# EAGLE board PCB v6 (EAGLE 9.7.0)
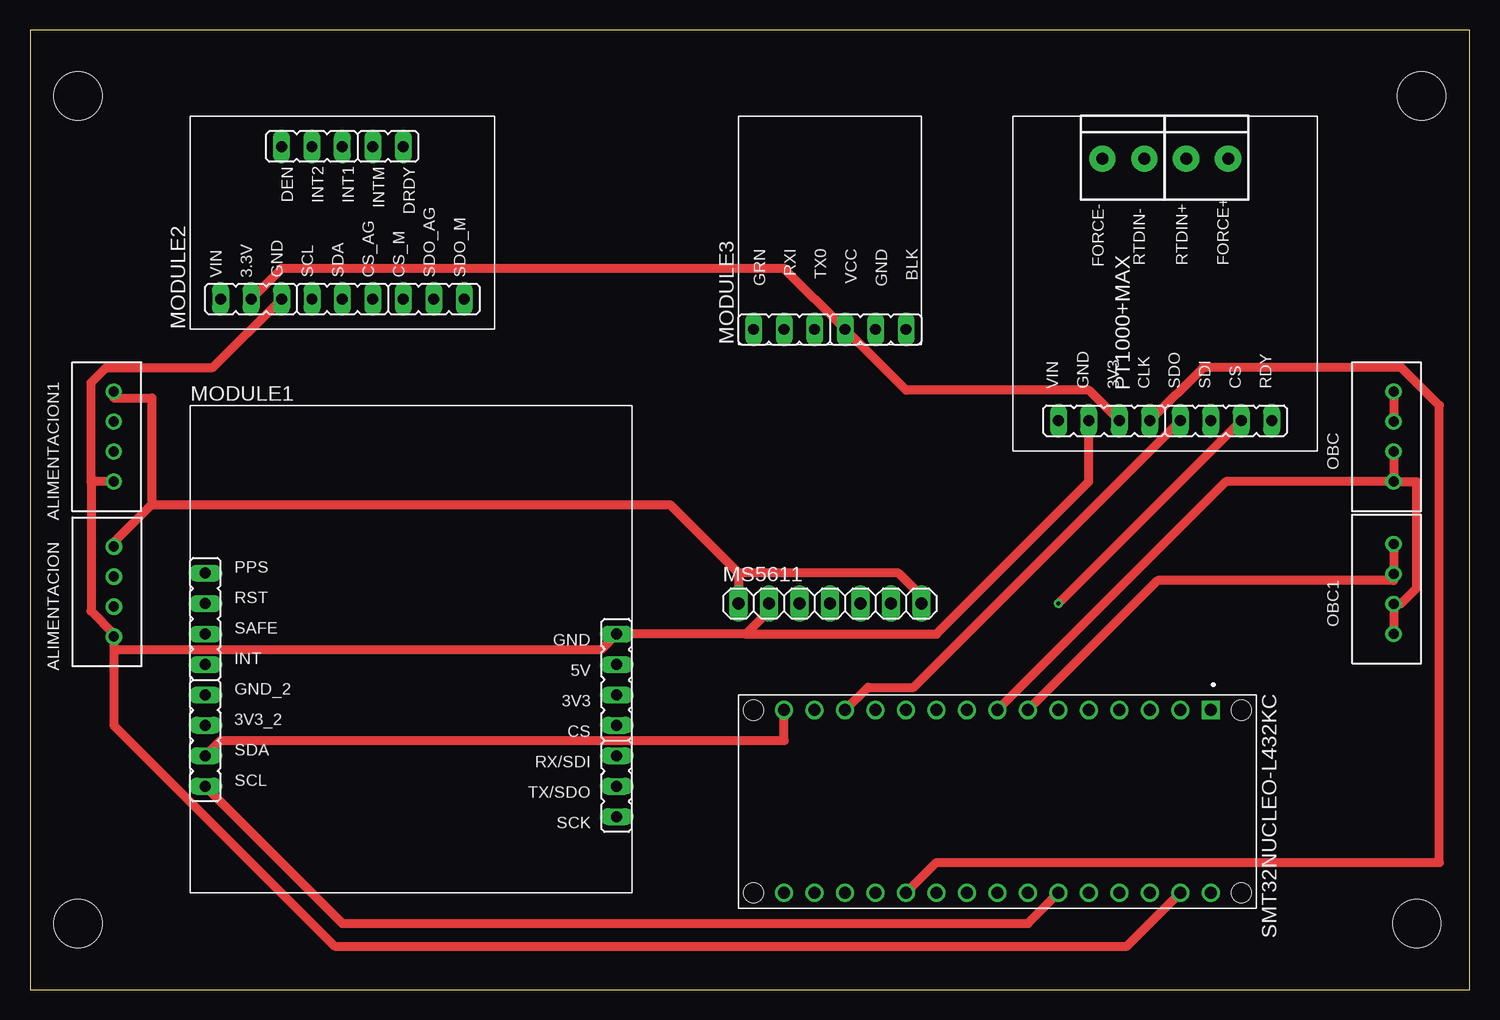
[diagram p0: board, top side]
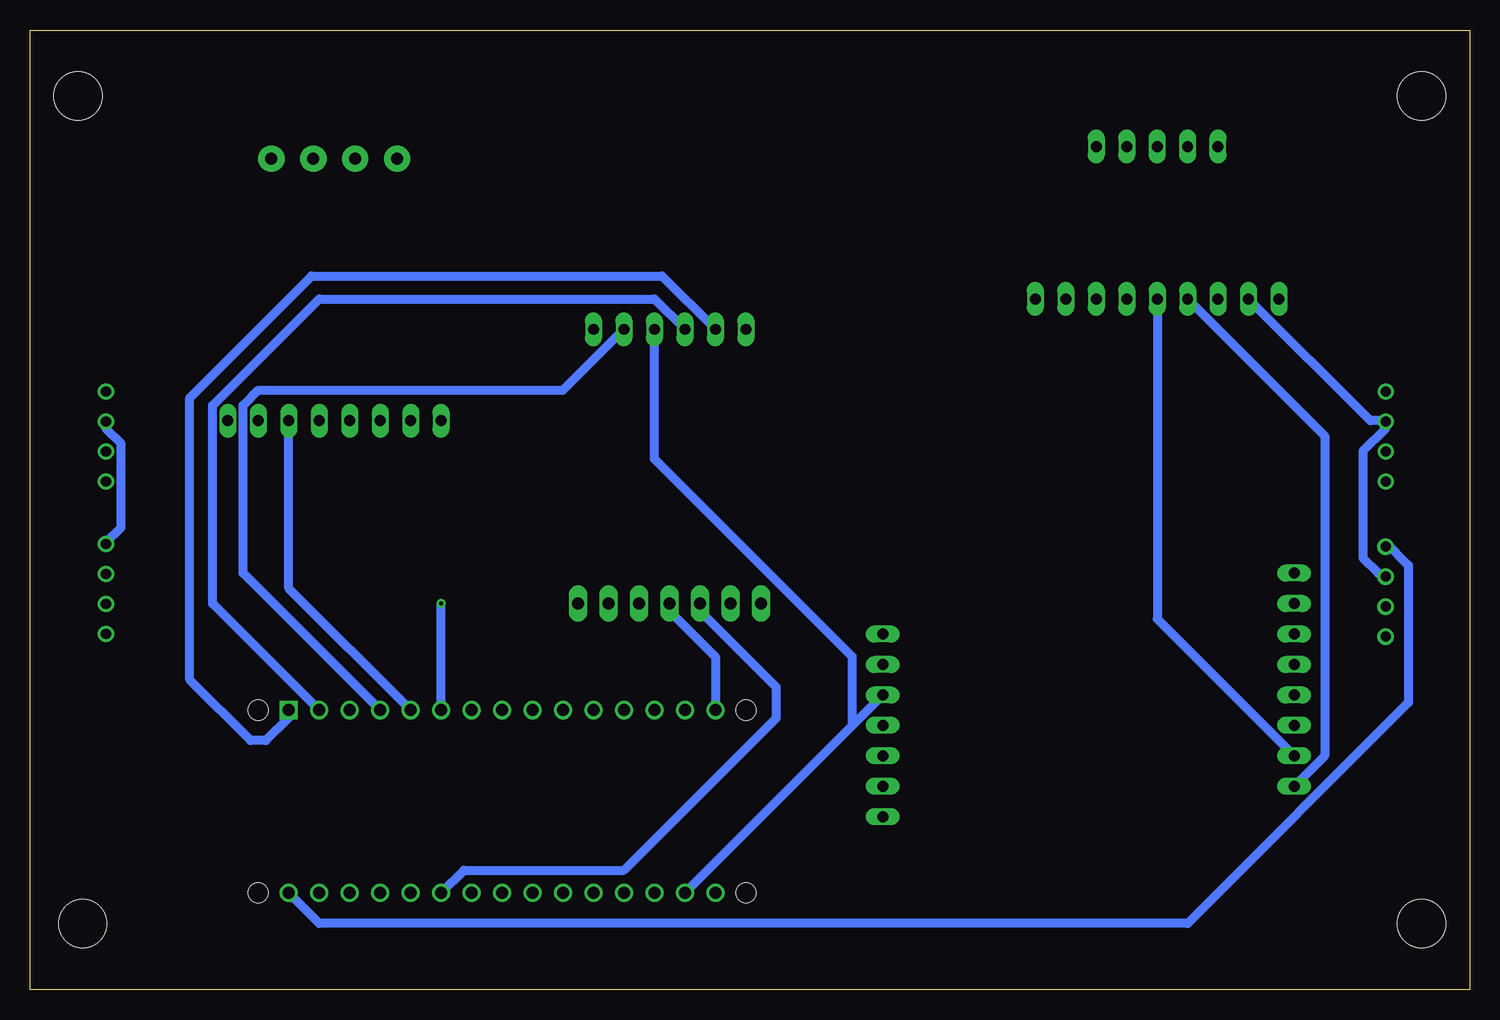
[diagram p1: board, bottom side, seen from below]

Size 120 x 80 mm. Coordinates in mm from the lower left corner, seen from the top.
Outline: 0,80 0,0 120,0 120,80 0,80
Copper layers (1*16): Top / Bottom
Stack-up Default Layer Stack: Top User Defined 0.035mm / Dielectric-1 User Defined 1.5mm / Bottom User Defined 0.035mm
Design rules "default": minimum track width 30mil, minimum drill 0.35mm, track to track 35mil, track to pad 6mil, pad to pad 6mil, via to via 6mil, smd to smd 6mil, copper to edge 30mil, drill to drill 15mil, minimum pad ring 10mil, minimum via ring 8mil, stop-mask expansion 4mil, vias tented up to drill 0mil, thermal gap 10mil
Holes 4 mm at 4,74.5 4,5.5 115.6,5.5 116,74.5

## Footprints (pad centres in the part's own frame; a part is rotated, then mirrored left to right if it is on the bottom)
B4B-XH-A = drill 0.84: 1 0,0; 2 2.5,0; 3 5,0; 4 7.5,0
GNSS = drill 0.914 long: 1 1.27,26.67; 2 1.27,24.13; 3 1.27,21.59; 4 1.27,19.05; 5 1.27,16.51; 6 1.27,13.97; 7 1.27,11.43; 8 1.27,8.89; 9 35.56,21.59; 10 35.56,19.05; 11 35.56,16.51; 12 35.56,13.97; 13 35.56,11.43; 14 35.56,8.89; 15 35.56,6.35
IMU = drill 0.914 long: 1 22.86,2.54; 2 20.32,2.54; 3 17.78,2.54; 4 15.24,2.54; 5 12.7,2.54; 6 10.16,2.54; 7 7.62,2.54; 8 5.08,2.54; 9 2.54,2.54; 10 7.62,15.24; 11 10.16,15.24; 12 12.7,15.24; 13 15.24,15.24; 14 17.78,15.24
LOGGER = drill 0.914 long: 1 13.97,1.27; 2 11.43,1.27; 3 8.89,1.27; 4 6.35,1.27; 5 3.81,1.27; 6 1.27,1.27
1X07 = drill 1.016 long: 1 -7.62,0; 2 -5.08,0; 3 -2.54,0; 4 0,0; 5 2.54,0; 6 5.08,0; 7 7.62,0
TEMP = drill 0.914 long: 1 21.59,2.54; 2 19.05,2.54; 3 16.51,2.54; 4 13.97,2.54; 5 11.43,2.54; 6 8.89,2.54; 7 6.35,2.54; 8 3.81,2.54 | drill 1 pad 2.184: 9 14.456,24.384; 10 17.956,24.384; 11 7.471,24.384; 12 10.971,24.384
MODULE_A000005 = drill 1 square: 1 -7.62,17.78 | drill 1: 2 -7.62,15.24; 3 -7.62,12.7; 4 -7.62,10.16; 5 -7.62,7.62; 6 -7.62,5.08; 7 -7.62,2.54; 8 -7.62,0; 9 -7.62,-2.54; 10 -7.62,-5.08; 11 -7.62,-7.62; 12 -7.62,-10.16; 13 -7.62,-12.7; 14 -7.62,-15.24; 15 -7.62,-17.78; 16 7.62,-17.78; 17 7.62,-15.24; 18 7.62,-12.7; 19 7.62,-10.16; 20 7.62,-7.62; 21 7.62,-5.08; 22 7.62,-2.54; 23 7.62,0; 24 7.62,2.54; 25 7.62,5.08; 26 7.62,7.62; 27 7.62,10.16; 28 7.62,12.7; 29 7.62,15.24; 30 7.62,17.78 | hole 1.651: -7.62,-20.32; 7.62,-20.32; -7.62,20.32; 7.62,20.32

## Placement (x,y rotation side)
ALIMENTACION  3A/250V  [B4B-XH-A]  7,29.42 90 top
ALIMENTACION1  3A/250V  [B4B-XH-A]  6.99,42.34 90 top
MODULE1  GNSS_NEO-M9N_SPARKFUN  [GNSS]  13.34,8.05 0 top
MODULE2  IMU_LSM9DS1_ADAFRUIT  [IMU]  13.34,55.04 0 top
MODULE3  LOGGER_OPENLOG-V15_SPARKFUN  [LOGGER]  59.06,53.77 0 top
MS5611  PINHD-1X7  [1X07]  66.68,32.18 0 top
OBC  3A/250V  [B4B-XH-A]  113.67,42.34 90 top
OBC1  3A/250V  [B4B-XH-A]  113.67,29.64 90 top
PT1000+MAX  TEMP_MAX31865_ADAFRUIT  [TEMP]  81.92,44.88 0 top
SMT32NUCLEO-L432KC  NANO_ATMEGA328  [MODULE_A000005]  80.65,15.67 270 top

## Library data of the parts
ALIMENTACION ALIMENTACION1 OBC OBC1 = Connector; CATEGORY: CONNECTOR; DSECRIPTION: 2.5mm pitch/disconnctable crimp style connector; MANUFACTURER: JST (XH connector); MPN: B4B-XH-A; OPERATING_TEMPERATURE: -25 C to 85 C; PART_STATUS: ACTIVE; ROHS_COMPLIANT: COMPLAINT; SERIES: B4B-XH-A; SUB_CATEGORY: Through hole; TYPE: TOP ENTRY
MODULE1-MODULE3 PT1000+MAX = Modulos_StratoBallon
MS5611 = Connector; CATEGORY: CONNECTOR; SUB-CATEGORY: PIN-HEADER
SMT32NUCLEO-L432KC = Modulos_StratoBallon; MANUFACTURER: Arduino; MAXIMUM_PACKAGE_HEIGHT: N/A; PARTREV: 23/03/2020; STANDARD: Manufacturer Recommendations

## Nets
3V3: ALIMENTACION1.3 ALIMENTACION.3 MODULE1.11 MODULE2.8 MODULE3.3 PT1000+MAX.6 SMT32NUCLEO-L432KC.17
5V: SMT32NUCLEO-L432KC.27
5V0: ALIMENTACION1.4 ALIMENTACION.4 MS5611.1 MS5611.7 SMT32NUCLEO-L432KC.30
AGND: ALIMENTACION1.1 ALIMENTACION.1 MODULE1.9 MODULE2.7 MS5611.2 PT1000+MAX.7 SMT32NUCLEO-L432KC.29
GND: MODULE3.2 SMT32NUCLEO-L432KC.4
N$1: MODULE1.7 MODULE2.5 MS5611.4 SMT32NUCLEO-L432KC.15
N$2: PT1000+MAX.5 SMT32NUCLEO-L432KC.20
N$3: PT1000+MAX.2 SMT32NUCLEO-L432KC.6
N$4: MODULE3.5 SMT32NUCLEO-L432KC.1
N$5: MODULE3.4 SMT32NUCLEO-L432KC.2
N$6: MODULE1.8 MODULE2.6 MS5611.3 SMT32NUCLEO-L432KC.25
N$8: PT1000+MAX.3 SMT32NUCLEO-L432KC.5
N$9: PT1000+MAX.4 SMT32NUCLEO-L432KC.13
N$10: OBC1.1 OBC1.2 OBC.1 OBC.2 SMT32NUCLEO-L432KC.8
N$11: OBC1.3 OBC1.4 OBC.3 OBC.4 SMT32NUCLEO-L432KC.7

## Tracks (layer width: path | path; a pad name or v marks a point on that pad's centre or on a via)
3V3
  Top 0.762: PT1000+MAX.6 88.27,49.96 73.03,49.96 MODULE3.3 62.87,60.12 20.96,60.12 MODULE2.8
  Bottom 0.762: ALIMENTACION.3 7.62,34.72 8.9,35.99 8.9,44.88 6.99,46.79 ALIMENTACION1.3 6.99,47.42 8.26,47.42 MODULE2.8 | SMT32NUCLEO-L432KC.17 51.44,22.02 | 51.44,22.02 MODULE1.11 | MODULE3.3 67.95,44.25 51.44,27.74 51.44,22.02
5V0
  Top 0.762: 59.06,34.72 MS5611.1 | 59.06,34.72 72.39,34.72 74.3,32.82 MS5611.7 | 10.16,40.44 6.99,37.26 ALIMENTACION.4 | 10.16,40.44 10.16,49.33 6.99,49.33 ALIMENTACION1.4 | 59.06,34.72 53.34,40.44 10.16,40.44
  Bottom 0.762: SMT32NUCLEO-L432KC.30 95.89,5.51 23.5,5.51 5.09,23.93 5.09,35.36 6.99,37.26 ALIMENTACION.4
AGND
  Top 0.762: 59.69,29.64 MODULE1.9 47.63,28.37 6.99,28.37 | 59.69,29.64 61.6,31.55 MS5611.2 | PT1000+MAX.7 88.27,42.34 75.57,29.64 59.69,29.64 | 5.09,42.34 5.09,31.55 6.99,29.64 ALIMENTACION.1 6.99,29.01 6.99,28.37 | ALIMENTACION1.1 5.09,42.34 | MODULE2.7 15.24,51.87 6.35,51.87 5.09,50.6 5.09,42.34 | SMT32NUCLEO-L432KC.29 91.44,3.61 25.41,3.61 6.99,22.02 6.99,28.37
GND
  Bottom 0.762: MODULE3.2 75.57,49.96 100.97,49.96 102.24,48.69 102.24,34.72 SMT32NUCLEO-L432KC.4
N$1
  Top 0.762: SMT32NUCLEO-L432KC.15 62.87,20.75 15.88,20.75 MODULE1.7
  Bottom 0.762: SMT32NUCLEO-L432KC.15 62.87,27.74 66.68,31.55 MS5611.4 | MODULE1.7 26.04,30.91 MODULE2.5
N$2
  Top 0.762: PT1000+MAX.5 97.79,51.87 114.31,51.87 117.48,48.69 117.48,10.59 75.57,10.59 SMT32NUCLEO-L432KC.20
N$3  (via drill 0.35)
  Top 0.762: v85.73,32.18 PT1000+MAX.2
  Bottom 0.762: SMT32NUCLEO-L432KC.6 v85.73,32.18
N$4
  Bottom 0.762: MODULE3.5 67.31,59.49 96.53,59.49 106.69,49.33 106.69,25.83 101.6,20.75 100.34,20.75 98.43,22.66 SMT32NUCLEO-L432KC.1
N$5
  Bottom 0.762: MODULE3.4 67.95,57.58 95.89,57.58 104.78,48.69 104.78,32.18 SMT32NUCLEO-L432KC.2
N$6
  Top 0.762: SMT32NUCLEO-L432KC.25 83.19,5.51 26.04,5.51 MODULE1.8
  Bottom 0.762: MODULE1.8 12.07,19.48 12.07,46.15 MODULE2.6 | MS5611.3 64.14,31.55 57.79,25.2 57.79,22.66 70.49,9.96 83.83,9.96 SMT32NUCLEO-L432KC.25
N$8
  Bottom 0.762: PT1000+MAX.3 98.43,33.45 SMT32NUCLEO-L432KC.5
N$9
  Top 0.762: PT1000+MAX.4 73.67,25.2 69.86,25.2 SMT32NUCLEO-L432KC.13
N$10
  Top 0.762: OBC1.1 OBC1.2 113.67,32.18 114.31,32.18 115.57,33.45 115.57,42.34 OBC.1 | OBC.2 OBC.1 | SMT32NUCLEO-L432KC.8 99.7,42.34 OBC.1
N$11
  Top 0.762: OBC.4 OBC.3 | OBC1.4 OBC1.3 113.67,34.09 93.99,34.09 SMT32NUCLEO-L432KC.7
  Bottom 0.762: OBC.3 113.67,46.79 112.4,45.52 112.4,38.53 113.67,37.26 OBC1.4